# Altium PCB esp32_PCB1.PcbDoc (part 3 of 3)
Units mil, origin at the board's own origin, x right, y up, seen from the top; angles counter-clockwise.
Board outline 2700 x 1000 mil, 4 copper layers (L1, L2, L3, L4), stack 61.583 mil thick; 64 components, 75 nets, 299 pads, 140 vias.
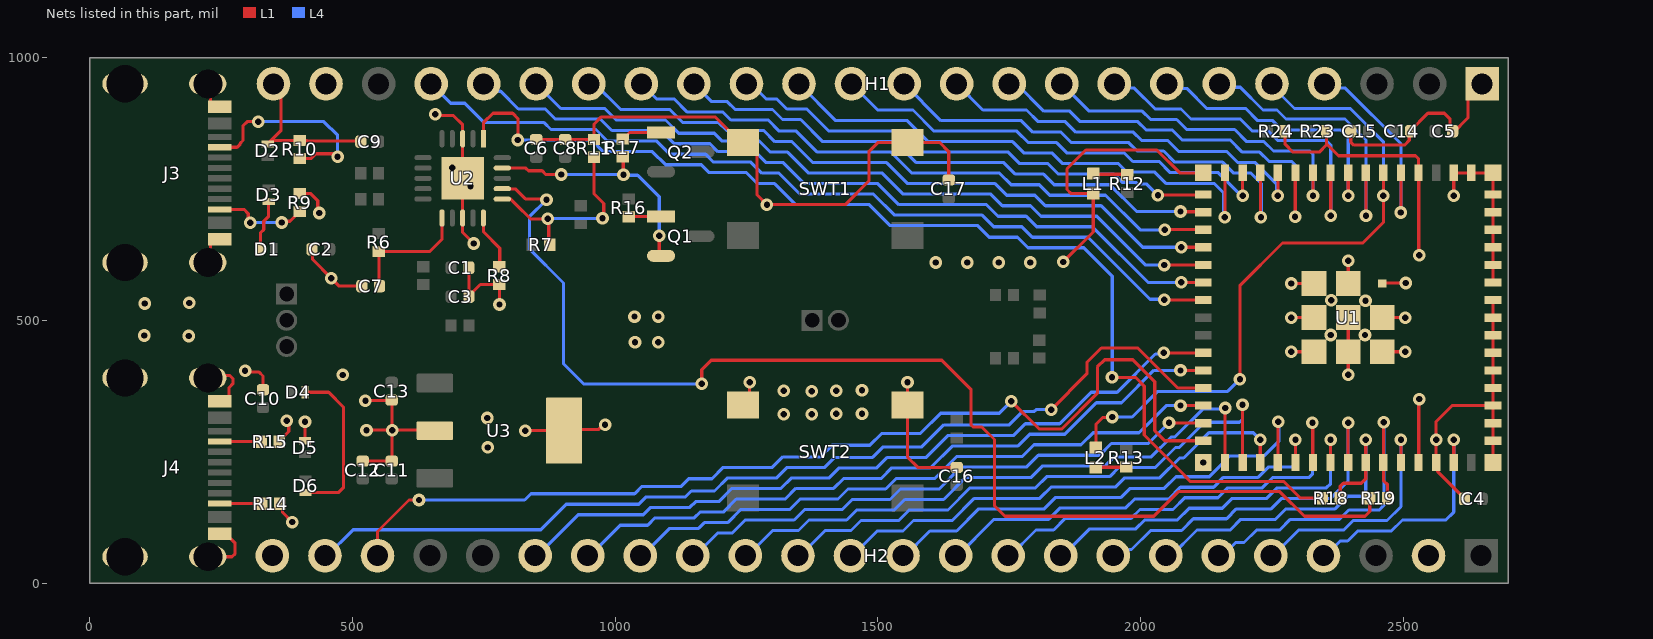
[diagram p4: the nets of this part, all layers, seen from the top]

## Via types
v1: diameter 24, hole 12, L1 to L4, tented both sides, 140 vias

## Nets (pads, with @x,y where several pads share a name; then routed paths per layer and width w, separated by ;. In a path a pad name is that pad's centre, name@x,y a point inside that pad or via, vN(x,y) a via of type N, cw(c..) or ccw(c..) an arc to the next point about the centre after c; other vN are vias at no path point) (continued)
GND: C1.2 C2.1 C3.2 C4.2 C5.2 C6.2 C7.2 C8.2 C9.2 C10.1 C11.1 C12.1 C13.2 C14.1 C15.1 C16.2 C17.1 D2.2 D5.2 H1.1 H1.23 H1.24 H2.2 H2.24 J3.A1B12 J3.B1A12 J3.S1 J3.S2 J3.S3 J3.S4 J4.A1B12 J4.B1A12 J4.S1 J4.S2 J4.S3 J4.S4 L1.1 R8.2 R9.2 R10.1 R11.1 R14.2 R15.1 SWT1.3 SWT1.4 SWT2.3 SWT2.4 U1.1 U1.2 U1.42 U1.43 U1.46 U1.47 U1.48 U1.49 U1.50 U1.51 U1.52 U1.53 U1.54 U1.55 U1.56 U1.57 U1.58 U1.59 U1.60 U1.61 U1.62 U1.63 U1.64 U1.65 U1.66 U1.67 U1.68 U1.69 U1.70 U1.71 U1.72 U1.73 U2.3 U2.13 U2.21 U3.2 U3.4 | length 5825.5
  L1 w6: J4.S2@225,50 271.14,50 277,55.86 277,75.56 258.46,94.09 J4.B1A12@247.64,94.09 ; J4.S1@225,390.16 229.84,395 267,395 272.86,389.14 272.86,379.14 265.28,371.56 265.28,352.87 258.46,346.06 J4.A1B12@247.64,346.06 ; J3.S2@225,609.84 230,614.84 230,647.13 236.81,653.94 J3.B1A12@247.64,653.94 ; J3.S1@225,950 230,945 230,912.72 236.81,905.91 J3.A1B12@247.64,905.91 ; v1(296,404) 298.68,401.32 322.68,401.32 330,394 C10.1@330,367.86 ; H2.24@350,50 H2.24@353.46,53.46 ; R15.1@360.86,269 360.86,270.18 379.07,288.39 379.07,301.14 375,305.21 v1(375,309) ; R14.2@361.86,151 366.91,145.95 366.91,135.09 v1(386,116) ; H1.24@364,950 364,860.59 D2.2@339,835.59 343.92,835.59 350.26,841.93 R10.1@400,841.93 ; R9.2@400,741 420.95,740.99 434.32,727.62 434.32,706.75 v1(437,704.07) ; D5.2@410,270.59 v1(410,307) ; 414,841.93 R10.1@400,841.93 ; C2.1@423.07,635 424.21,633.86 424.21,615.79 v1(460,580) 475,565 C7.2@518.07,565 ; C9.2@516.14,840 515.18,840.96 400.96,840.96 R10.1@400,841.93 ; C12.1@520,231.93 C11.1@575,231.93 575.5,232.43 575.5,290.5 v1(576,291) ; v1(525,347) 525.54,347.54 574.46,347.54 C13.2@575,348.07 575.5,347.57 575.5,291.5 v1(576,291) ; v1(527,291) v1(576,291) ; U3.2@656.97,290 655.97,291 v1(576,291) ; v1(658,892) 660.68,889.32 692.68,889.32 710,872 U2.3@710,845.41 U2.21@710,770 ; C3.2@721.93,545 C3.2@721.93,546.18 ; C1.2@721.93,600 C3.2@721.93,546.18 ; v1(725,755) U2.21@710,770 ; v1(731,646) 710,667 U2.13@710,694.59 U2.21@710,770 ; v1(780,530) R8.2@780,568.07 743.82,568.07 C3.2@721.93,546.18 ; v1(829,290) U3.4@903.03,290 905.03,292 968.21,292 977.21,301 v1(981,301) ; C6.2@847.88,845.94 C6.2@848.82,845 ; C6.2@850,843.93 C8.2@905,843.93 R11.1@960,843.93 960,873 974,887 1190.17,887 1238.58,838.58 SWT1.4@1243.5,838.58 1248.43,838.58 1270.02,816.99 1270.02,738.98 v1(1289,720) 1438,720 1483,765 1483,821 1500.58,838.58 SWT1.3@1556.5,838.58 1617.42,838.58 1635,821 C17.1@1635,766.93 ; SWT2.4@1243.5,338.58 1256.06,351.14 v1(1256.06,382.03) ; v1(1556.5,382.03) SWT2.3@1556.5,338.58 1556.5,239.5 1576,220 C16.2@1650,220 ; v1(1853,611) 1910,668 L1.1@1910,741 1867.86,741 1860,748.86 1860,788 1896,824 2031,824 2074.45,780.55 U1.63@2119.45,780.55 ; v1(2286.63,440) U1.73@2330.08,440 ; v1(2286.63,504.96) U1.72@2330.08,504.96 ; v1(2286.63,569.92) U1.71@2330.08,569.92 ; v1(2395.04,396.55) U1.70@2395.04,440 U1.61@2395.04,504.96 ; U1.69@2395.04,569.92 v1(2395.04,613.37) ; C15.1@2400,860 2400,839.05 2405.86,833.19 2502.19,833.19 2511.25,842.25 2511.25,857.39 C14.1@2513.86,860 2513.86,861.18 2546.68,894 2578,894 2588.62,883.38 2588.62,860.24 2593.86,855 2593.86,856.18 2623,885.32 2623,923 H1.1@2650,950 ; U1.67@2460,504.96 v1(2503.45,504.96) ; U1.66@2460,569.92 2460.98,570.91 v1(2504.43,570.91) ; U1.68@2461.97,438.03 U1.68@2460,440 v1(2503.45,440) ; U1.42@2528.9,229.37 2529.45,229.92 2529.45,349.45 v1(2530,350) ; v1(2595.83,737.1) U1.2@2595.83,780.55 U1.1@2629.29,780.55 U1.62@2670.63,780.55 U1.60@2670.63,739.21 U1.59@2670.63,705.75 U1.58@2670.63,672.28 U1.57@2670.63,638.82 U1.56@2670.63,605.35 U1.55@2670.63,571.89 U1.55@2669.65,570.91 ; C4.2@2616.14,158.82 C4.2@2616.14,160 2616.14,161.18 2565.24,212.09 2565.24,226.5 U1.43@2562.36,229.37 v1(2562.36,272.82) 2562.36,307.36 2592.64,337.64 U1.48@2670.63,337.64 ; U1.49@2669.73,372 U1.49@2670.63,371.1 ; U1.65@2670.63,229.37 U1.46@2670.63,270.71 U1.47@2670.63,304.17 U1.48@2670.63,337.64 ; U1.54@2670.63,538.43 U1.53@2670.63,504.96 U1.52@2670.63,471.5 U1.51@2670.63,438.03 U1.50@2670.63,404.57 U1.49@2670.63,371.1 ; U1.48@2670.63,337.64 U1.49@2670.63,371.1
  other v1: 2119.45,229.37 758,258 757,314 1321,321 1374,321 1421,322 1470,322 1374,365 1321,366 1421,366 1470,367 482,396 1038,458 1082,458 189,470 104,471 2362,472 2427,472 1037,507 1082,507 105,532 190,533 2428,537 2363,538 1610,610 1670,610 1730,610 1790,610 690,790
GPIO0: R23.2 R24.2 U1.4 | length 505.5
  L1 w6: R24.2@2275,860 2275,835 2290,820 2340,820 2353.86,833.86 ; R23.2@2353.86,855 2353.86,836 2376.67,813.19 2501.83,813.19 2523.04,813.19 2528.9,807.33 U1.4@2528.9,780.55 2529.45,780 2529.45,624.55 v1(2530,624)
GPIO1: H1.4 U1.5 | length 398.9
  L1 w6: v1(2495,705) 2495.22,705.22 2495.22,780.33 U1.5@2495.43,780.55
  L4 w6: H1.4@2350.38,950 2358.11,942.27 2388.73,942.27 2495.43,835.57 2495.43,705.43 v1(2495,705)
GPIO2: H1.5 L2.1 U1.6 | length 1311.8
  L1 w6: L2.1@1915,257.66 1915,301.75 1928.54,315.28 1945.28,315.28 v1(1946,316) ; v1(2189,388) 2189,566 2270,647 2423,647 2461.97,685.97 v1(2461.97,737.1) U1.6@2461.97,780.55
  L4 w6: v1(1946,316) 1984,316 2032.64,364.64 2165.64,364.64 v1(2189,388) ; H1.5@2250,950 2250,946 2293,903 2399,903 2461.97,840.03 v1(2461.97,737.1)
GPIO3: H1.6 U1.7 | length 549.1
  L1 w6: U1.7@2428.5,780.55 2428.75,780.3 2428.75,699.25 v1(2429,699)
  L4 w6: H1.6@2150,950 2156.73,943.27 2189.73,943.27 2233,900 2259.71,900 2276.71,883 2389,883 2429,843 v1(2429,699)
GPIO4: H1.7 U1.8 | length 541.6
  L1 w6: v1(2395.04,737.1) U1.8@2395.04,780.55
  L4 w6: H1.7@2050,950 2058.73,941.27 2087.73,941.27 2126,903 2200,903 2223,880 2251.42,880 2269.42,862 2381,862 2395.04,847.96 v1(2395.04,737.1)
GPIO5: H1.8 U1.9 | length 676.2
  L1 w6: U1.9@2361.57,780.55 2361.79,780.34 2361.79,699.21 v1(2362,699)
  L4 w6: H1.8@1950,950 1958.23,941.77 1988.23,941.77 2028,902 2076.89,902 2095.89,883 2190,883 2213,860 2243.14,860 2261.14,842 2353,842 2362,833 v1(2362,699)
GPIO6: H1.9 U1.10 | length 656
  L1 w6: v1(2328.11,737.1) U1.10@2328.11,780.55
  L4 w6: H1.9@1850,950 1902,898 2003,898 2019,882 2068.6,882 2087.6,863 2179,863 2202,840 2234.85,840 2252.85,822 2322.25,822 2328.11,816.14 v1(2328.11,737.1)
GPIO7: H1.10 U1.11 | length 791
  L1 w6: v1(2294,697) 2294.32,697.32 2294.32,780.23 U1.11@2294.65,780.55
  L4 w6: H1.10@1750,950 1764,950 1816,898 1865.14,898 1885.14,878 1994.72,878 2010.72,862 2060.32,862 2079.32,843 2170.72,843 2193.72,820 2226.57,820 2244.57,802 2287.79,802 2294.65,795.14 2294.65,697.65 v1(2294,697)
GPIO8: H1.11 U1.12 | length 754.5
  L1 w6: v1(2261.18,737.1) U1.12@2261.18,780.55
  L4 w6: H1.11@1650,950 1700,900 1783,900 1805,878 1856.85,878 1876.85,858 1986,858 2002,842 2052.04,842 2073.04,821 2164.43,821 2185.43,800 2218.28,800 2258.5,759.78 2258.5,739.78 v1(2261.18,737.1)
GPIO9: H1.12 U1.13 | length 908.2
  L1 w6: U1.13@2227.72,780.55 2228.36,779.91 2228.36,696.64 v1(2229,696)
  L4 w6: H1.12@1550,950 1620,880 1773,880 1795,858 1848.57,858 1868.57,838 1977.72,838 1993.72,822 2043.75,822 2064.75,801 2156.15,801 2177.15,780 2210,780 2230,760 2230,697 v1(2229,696)
GPIO10: H1.13 U1.14 | length 875.9
  L1 w6: v1(2194.25,737.1) U1.14@2194.25,780.55
  L4 w6: H1.13@1450,950 1500,900 1567,900 1607,860 1764.72,860 1786.72,838 1840.28,838 1860.28,818 1969.43,818 1985.43,802 2035.47,802 2056.47,781 2147.86,781 2191.76,737.1 v1(2194.25,737.1)
GPIO11: H1.14 U1.15 | length 1026.2
  L1 w6: v1(2160,696) 2160.39,696.39 2160.39,780.16 U1.15@2160.79,780.55
  L4 w6: H1.14@1350,950 1420,880 1556,880 1596,840 1756.43,840 1778.43,818 1832,818 1852,798 1958,798 1974,782 2027.18,782 2049.18,760 2140.58,760 2158.32,742.26 2158.32,697.68 v1(2160,696)
GPIO12: H1.15 U1.16 | length 957.8
  L1 w6: v1(2033,738) 2033.61,738.61 2118.84,738.61 U1.16@2119.45,739.21
  L4 w6: H1.15@1250,950 1258.47,950 1287.47,921 1307.99,921 1326.99,902 1365,902 1407,860 1542,860 1582,820 1748.15,820 1770.15,798 1823.72,798 1843.72,778 1949.72,778 1965.72,762 1992,762 1995,759 2012,759 v1(2033,738)
GPIO13: H1.16 U1.17 | length 1070
  L1 w6: v1(2076,707) 2076.63,706.37 2118.37,706.37 U1.17@2118.87,705.87
  L4 w6: H1.16@1150,950 1184,916 1213.71,916 1228.71,901 1299.71,901 1318.71,882 1353,882 1395,840 1533.28,840 1573.28,800 1739.86,800 1761.86,778 1815.43,778 1835.43,758 1941.43,758 1992.43,707 v1(2076,707)
GPIO14: H1.17 U1.18 | length 1184.4
  L1 w6: v1@2046,672.53 U1.18@2119.2,672.53
  L4 w6: H1.17@1050,950 1079,921 1112.53,921 1137.53,896 1205.42,896 1220.42,881 1291.42,881 1312.42,860 1345,860 1385,820 1525,820 1565,780 1731.58,780 1753.58,758 1807.15,758 1827.15,738 1933.15,738 1999.15,672 v1(2046,672)
GPIO15: H1.18 U1.19 | length 1298
  L1 w6: v1(2077.45,639.07) U1.19@2119.2,639.07
  L4 w6: H1.18@950,950 961.57,950 1010.57,901 1067,901 1104.25,901 1129.25,876 1197.14,876 1212.14,861 1283.14,861 1304.14,840 1336.72,840 1376.72,800 1516.72,800 1556.72,760 1723.29,760 1745.29,738 1798.86,738 1818.86,718 1924.86,718 2003.79,639.07 v1(2077.45,639.07)
GPIO16: H1.19 U1.20 | length 1412.4
  L1 w6: v1(2045,605) 2045.18,605.18 2118.77,605.18 U1.20@2119.2,605.6
  L4 w6: H1.19@850,950 897,903 980.28,903 1002.28,881 1058.72,881 1095.96,881 1120.96,856 1188.85,856 1203.85,841 1274.85,841 1295.85,820 1328.43,820 1368.43,780 1508.43,780 1548.43,740 1715.01,740 1737.01,718 1790.58,718 1810.58,698 1916.58,698 2009.58,605 v1(2045,605)
GPIO17: H1.20 U1.21 | length 1525.7
  L1 w6: v1(2077.45,572.14) U1.21@2119.2,572.14
  L4 w6: H1.20@750,950 764.61,950 778.85,935.77 782.23,935.77 816,902 867.28,902 886.28,883 972,883 994,861 1050.43,861 1087.68,861 1112.68,836 1180.57,836 1195.57,821 1266.57,821 1287.57,800 1320.15,800 1360.15,760 1500.15,760 1540.15,720 1706.73,720 1728.73,698 1782.29,698 1802.29,678 1908.29,678 2014.16,572.14 v1(2077.45,572.14)
GPIO18: H1.21 U1.22 | length 1639.4
  L1 w6: v1@2045,538.68 U1.22@2119.2,538.68
  L4 w6: H1.21@650,950 687.05,912.95 714.05,912.95 751,876 865,876 878,863 963.72,863 985.72,841 1079.4,841 1104.4,816 1172.28,816 1187.28,801 1258.28,801 1279.28,780 1311.86,780 1351.86,740 1491.86,740 1531.86,700 1698.44,700 1720.44,678 1774.01,678 1794.01,658 1900.01,658 2018,540.01 2043.99,540.01 v1(2045,539)
GPIO21: H2.19 U1.25 | length 1430.2
  L1 w6: v1(2044,438) U1.25@2119.45,438.03
  L4 w6: H2.19@850,50 930,130 1053.72,130 1067.72,144 1142.43,144 1153.43,155 1197.57,155 1222.57,180 1315.86,180 1335.86,200 1407.58,200 1426.58,219 1498.29,219 1518.29,239 1592.01,239 1634.01,281 1758.73,281 1780.73,303 1846,303 1906,363 1955.43,363 2028.12,435.69 2041.69,435.69 v1(2044,438)
GPIO26: H2.18 U1.26 | length 1316.3
  L1 w6: v1(2076,404.57) U1.26@2119.45,404.57
  L4 w6: H2.18@950,50 1010,110 1062,110 1076,124 1150.72,124 1161.72,135 1205.85,135 1230.85,160 1324.15,160 1344.15,180 1415.86,180 1434.86,199 1506.58,199 1526.58,219 1600.29,219 1642.29,261 1767.01,261 1789.01,283 1856,283 1916,343 1963.72,343 2025.28,404.57 v1(2076,404.57)
GPIO33: H2.17 U1.28 | length 1188.6
  L1 w6: v1(2076,337.64) U1.28@2119.45,337.64
  L4 w6: H2.17@1050,50 1104,104 1159,104 1170,115 1214.14,115 1239.14,140 1332.43,140 1352.43,160 1424.15,160 1443.15,179 1514.86,179 1534.86,199 1608.58,199 1650.58,241 1775.29,241 1797.29,263 1886.72,263 1909.72,286 1997.06,286 2021.12,310.06 2048.7,337.64 v1(2076,337.64)
GPIO34: H2.16 U1.29 | length 1075.3
  L1 w6: v1(2054.12,304.88) 2054.48,304.52 2119.1,304.52 U1.29@2119.45,304.17
  L4 w6: H2.16@1150,50 1195,95 1222.42,95 1247.42,120 1340.72,120 1360.72,140 1432.43,140 1451.43,159 1523.15,159 1543.15,179 1616.86,179 1658.86,221 1783.58,221 1805.58,243 1922,243 1944.42,265.42 2014.67,265.42 v1(2054.12,304.88)
GPIO35: H2.15 U1.31 | length 1131.9
  L1 w6: U1.31@2160.79,229.37 2160.89,229.48 2160.89,332.89 v1(2161,333)
  L4 w6: H2.15@1250,50 1300,100 1349,100 1369,120 1440.72,120 1459.72,139 1531.43,139 1551.43,159 1625.15,159 1667.15,201 1791.86,201 1813.86,223 1933,223 1950,240 2020.19,240 2058.07,277.88 2065.31,277.88 2118.43,331 2159,331 v1(2161,333)
GPIO36: H2.14 U1.32 | length 1089.3
  L1 w6: v1(2194,339) 2194.13,338.87 2194.13,229.5 U1.32@2194.25,229.37
  L4 w6: H2.14@1350,50 1400,100 1449,100 1468,119 1539.72,119 1559.72,139 1633.43,139 1675.43,181 1800.15,181 1822.15,203 1942,203 1959,220 2028.48,220 2066.35,257.88 2073.59,257.88 2121.72,306 2188.14,306 2194,311.86 v1(2194,339)
GPIO37: H2.13 U1.33 | length 924.4
  L1 w6: U1.33@2227.72,229.37 v1(2227.72,272.82)
  L4 w6: H2.13@1450,50 1499,99 1548,99 1568,119 1641.72,119 1683.72,161 1808.43,161 1830.43,183 1953,183 1970,200 2036.76,200 2074.64,237.88 2081.88,237.88 2130,286 2214.54,286 v1(2227.72,272.82)
GPIO38: H2.12 U1.34 | length 919.6
  L1 w6: U1.34@2261.18,229.37 2261.59,229.78 2261.59,306.59 v1(2262,307)
  L4 w6: H2.12@1550,50 1599,99 1650,99 1692,141 1816.72,141 1838.72,163 1963,163 1980,180 2045.05,180 2067.42,202.37 2130.63,202.37 2170.26,242 2235.08,242 2263,269.92 2263,306 v1(2262,307)
GPIO39: H2.11 U1.35 | length 807.3
  L1 w6: U1.35@2294.65,229.37 v1(2294.65,272.82)
  L4 w6: H2.11@1650,50 1721,121 1825,121 1847,143 1972,143 1989,160 2053.33,160 2075.7,182.37 2138.92,182.37 2157.55,201 2223.58,201 2243.58,221 2288.79,221 2294.65,226.86 v1(2294.65,272.82)
GPIO40: H2.10 U1.36 | length 816.1
  L1 w6: v1(2327,305) 2327.56,304.44 2327.56,229.93 U1.36@2328.11,229.37
  L4 w6: H2.10@1750,50 1801,101 1834.53,101 1856.53,123 1982,123 1999,140 2061.62,140 2083.99,162.37 2147.2,162.37 2165.83,181 2231.86,181 2251.86,201 2321,201 2327,207 v1(2327,305)
GPIO41: H2.9 U1.37 | length 696.4
  L1 w6: U1.37@2361.57,229.37 v1(2361.57,272.82)
  L4 w6: H2.9@1850,50 1903,103 1991,103 2008,120 2069.9,120 2092.27,142.37 2155.49,142.37 2174.12,161 2240.15,161 2260.15,181 2353.58,181 2361.57,189 v1(2361.57,272.82)
GPIO42: H2.8 U1.38 | length 691.2
  L1 w6: U1.38@2395.04,229.37 v1(2395,305)
  L4 w6: H2.8@1950,50 1964.61,50 1978.35,63.73 1982.73,63.73 2019,100 2078.18,100 2100.55,122.37 2163.77,122.37 2182.4,141 2248.43,141 2268.43,161 2361.86,161 2395,194.14 v1(2395,305)
GPIO45: H2.5 U1.41 | length 455.8
  L1 w6: U1.41@2495.43,229.37 v1(2495.43,272.82)
  L4 w6: H2.5@2250,50 2301,101 2386.72,101 2404.72,119 2469,119 2495.43,145.43 v1(2495.43,272.82)
GPIO46: H2.4 U1.44 | length 462.4
  L1 w6: U1.44@2595.83,229.37 v1(2595.83,272.82)
  L4 w6: H2.4@2350,50 2380,80 2394,80 2413,99 2477.28,99 2498.28,120 2581,120 2595.83,134.83 v1(2595.83,272.82)
GPIO47: H2.23 U1.27 | length 1878.2
  L1 w6: v1(1829.91,330) 1897.85,397.92 1897.85,419.65 1925.38,447.18 1994.82,447.18 2070.9,371.1 U1.27@2119.45,371.1
  L4 w6: H2.23@450,50 501.5,101.5 858.5,101.5 907,150 1045.43,150 1059.43,164 1134.15,164 1145.15,175 1189.28,175 1214.28,200 1307.58,200 1327.58,220 1399.29,220 1418.29,239 1490.01,239 1510.01,259 1583.73,259 1625.73,301 1750.44,301 1776.12,326.68 1797.91,326.68 1801.23,330 v1(1829.91,330)
GPIO48: H2.22 U1.30 | length 1944.8
  L1 w6: H2.22@548,52 548,98 608,158 v1(627,158) ; v1(1754,346) 1807,293 1850,293 1917.85,360.85 1917.85,411.37 1931.48,425 1957,425 1957.18,424.82 1985.18,424.82 2027,383 2027,290 2046.29,270.71 U1.30@2119.45,270.71
  L4 w6: v1(627,158) 827.97,158 839.97,170 1037.15,170 1051.15,184 1125.86,184 1140.36,198.5 1184.5,198.5 1206,220 1299.29,220 1319.29,240 1391.01,240 1413.26,262.25 1484.98,262.25 1507.23,284.5 1580.94,284.5 1619.44,323 1731,323 v1(1754,346)
NetC7_1: C7.1 R6.2 U2.11 | length 237.6
  L1 w6: C7.1@551.93,565 550.96,565.96 550.96,630.18 R6.2@550,631.14 647.77,631.14 670.63,654 U2.11@670.63,694.59
NetD1_2: D1.2 D3.2 | length 97.8
  L1 w6: D1.2@325,635 325,666 331.57,672.57 331.57,688.34 340.82,697.59 D3.2@340.82,726.23
NetD4_2: D4.2 D6.2 | length 314.2
  L1 w6: D4.2@410,363 455,363 483,335 483,181 474.41,172.41 D6.2@411,172.41
NetJ3_A5: J3.A5 R10.2 | length 392
  L1 w6: J3.A5@247.64,829.13 280.86,829.13 286.43,834.7 286.43,836.48 287,837.05 292,842.05 292,870 300,878 v1(321,878) ; R10.2@400,808.07 422.07,808.07 431,817 466,817 v1(472,811)
  L4 w6: v1(321,878) 446,878 472,852 v1(472,811)
NetJ3_B5: J3.B5 R9.1 | length 180.6
  L1 w6: J3.B5@247.64,711.02 293.98,711.02 302.12,702.88 302.12,689.04 v1(305.57,685.6) ; v1(366,686) 368.54,688.54 381.4,688.54 392.19,699.33 392.19,700.51 398.82,707.14 R9.1@400,707.14
  L4 w6: v1(305.57,685.6) 305.77,685.8 365.8,685.8 v1(366,686)
NetJ4_A5: J4.A5 R15.2 | length 79.5
  L1 w6: J4.A5@247.64,269.29 247.78,269.15 326.85,269.15 R15.2@327,269
NetJ4_B5: J4.B5 R14.1 | length 80.4
  L1 w6: J4.B5@247.64,151.18 247.73,151.09 327.91,151.09 R14.1@328,151
NetL1_2: L1.2 R12.1 | length 65.9
  L1 w6: L1.2@1910,779 1911.04,777.96 1973.96,777.96 R12.1@1975,776.93
NetL2_2: L2.2 R13.1 | length 58.6
  L1 w6: L2.2@1915,219.66 1915.7,220.37 1972.3,220.37 R13.1@1973,221.07
NetQ1_1: Q1.1 R16.1 | length 68.2
  L1 w6: R16.1@1024.82,697.07 R16.1@1026,697.07 1026.17,697.24 1087.41,697.24 Q1.1@1087.58,697.4 Q1.1@1085.71,699.27 ; R16.1@1025,701.14 R16.1@1026.87,699.27
NetQ2_1: Q2.1 R17.1 | length 78.2
  L1 w6: R17.1@1015,845 1016.18,845 1021.81,850.63 1021.81,851.54 1027.67,857.4 Q2.1@1087.58,857.4
NetR8_1: R8.1 U2.15 | length 106.7
  L1 w6: 749.37,668.63 U2.15@749.37,694.59 ; 750,668 780.65,637.35 780.65,603.76 778.82,601.93 R8.1@780,601.93
RTS_FTDI: Q1.2 R17.2 U2.19 | length 469.7
  L1 w6: U2.19@785.41,789.68 785.5,789.6 825.95,789.6 830.12,789.6 835.28,784.44 861.18,784.44 868.16,777.47 v1(897.63,777.47) ; R17.2@1015,811.14 1015.5,810.64 1015.5,777.5 v1(1016,777) ; v1(1084,661) 1084,626.18 Q1.2@1087.58,622.6
  L4 w6: v1(897.63,777.47) 1015.53,777.47 1017,776 1043,776 1084,735 v1(1084,661)
RXD_FTDI: R18.2 U2.1 | length 2129.9
  L1 w6: U2.1@749.37,845.41 749.37,875.55 767.82,894 805,894 815,884 v1(815,843) ; v1(1945.62,391.38) 1990.34,391.38 2007,374.72 2007,281.72 2085,203.72 2085,203 2095,193 2272.87,193 2304.23,161.64 R18.2@2346.01,161.64
  L4 w6: v1(815,843) 955.43,843 977.43,821 1071.11,821 1096.11,796 1164,796 1179,781 1250,781 1271,760 1303.58,760 1343.58,720 1483.58,720 1523.58,680 1690.16,680 1712.16,658 1765.73,658 1785.73,638 1891.73,638 1946,583.73 1946,391.75 v1(1945.62,391.38)
TXD_FTDI: R19.2 U2.17 | length 2334.1
  L1 w6: U2.17@785.41,750.32 785.71,750.02 810.37,750.02 811,749.39 829.39,731 867.94,731 v1(869.47,729.47) ; v1(1165,379) 1165,406 1182.89,423.89 1621.88,423.89 1659.77,386 1677,368.77 1677,301.69 1681.69,297 1698,297 1722,273 1722,147 1742,127 2025,127 2072,174 2265,174 2312,127 2427,127 2436.01,136.01 R19.2@2436.01,161.64
  L4 w6: v1(869.47,729.47) 837,697 837,636 902,571 902,417 940,379 v1(1165,379)
U0RXD: H2.6 R19.1 U1.40 | length 659.8
  L1 w6: v1(2463,306) 2462.48,305.48 2462.48,229.89 U1.40@2461.97,229.37 2461.97,195.03 2470,187 2470,161.77 R19.1@2469.87,161.64
  L4 w6: H2.6@2150,50 2153.86,50 2180.86,77 2196.71,77 2220.71,101 2265,101 2285,121 2378.43,121 2396.43,139 2454.15,139 2463,147.85 v1(2463,306)
U0TXD: H2.7 R18.1 U1.39 | length 681.8
  L1 w6: R18.1@2379.87,161.64 2380,161.77 2380,184.14 2385.86,190 2420,190 2428.5,198.5 U1.39@2428.5,229.37 v1(2428.5,272.82)
  L4 w6: H2.7@2050,50 2056.47,50 2107.47,101 2170.68,101 2190.68,121 2256.72,121 2276.72,141 2370.15,141 2394.29,165.14 2422.65,165.14 2428.5,171 v1(2428.5,272.82)
VBUS_SENSE: R7.1 R11.2 U2.16 | length 381.9
  L1 w6: U2.16@785.41,730.63 785.64,730.4 801.58,730.4 811,720.98 838.98,693 v1(872,693) 873.93,691.07 873.93,645.93 R7.1@875.86,644 ; R11.2@960,810.07 960,740.6 978.4,722.2 978.4,696.4 v1(976,694)
  L4 w6: v1(872,693) 872.5,693.5 975.5,693.5 v1(976,694)
pads on no net: J3.A8 J3.B8 J4.A8 J4.B8 U2.2 U2.4 U2.5 U2.6 U2.7 U2.14

## Polygon pours and split planes (outlines as drawn)
GND on L1 "GND_L01_P011" (solid, pour order 11): 411,646 411,595 447,559 447,396 448,396 503,341 503,221 589,221 602,234 602,248 716,248 732,232 789,232 815,206 963,206 1012,255 1012,343 1021,343 1118,440 1118,551 1109,560 1024,560 996,532 996,443 928,375 822,375 822,373 786,337 679,337 677,335 599,335 590,344 590,355 585,360 535,360 516,379 516,513 531,528 531,576 529,578 504,578 501,575 479,575 476,578 476,583 465,594 461,594 437,618 434,618 434,625 435,626 435,646 433,648 413,648
GND on L1 "GND_L01_P017" (solid, pour order 17): 2290,608 2309,627 2485,627 2520,592 2578,592 2614,628 2614,805 2690,805 2690,207 2654,207 2651,210 2651,325 2594,325 2567,298 2516,298 2516,321 2472,365 2280,365 2240,405 2240,576 2272,608
GND on L1 "GND_L01_P014" (solid, pour order 14): 1583,584 1592,575 1838,575 1940,677 1940,751 1936,755 1886,755 1881,760 1881,792 1894,805 2000,805 2045,760 2133,760 2138,765 2138,801 2095,844 1846,844 1669,667 1630,628 1593,628 1583,618
GND on L1 "GND_L01_P013" (solid, pour order 13): 1204,396 1202,394 1202,300 1219,283 1278,283 1353,208 1662,208 1667,213 1667,234 1659,242 1609,242 1601,250 1605,254 1605,330 1610,335 1610,385 1595,400 1569,400
GND on L1 "GND_L01_P012" (solid, pour order 12): 711,613 711,530 716,525 750,525 750,524 764,510 797,510 806,519 805,520 805,576 803,578 752,578 752,580 740,592 740,611 734,617 714,617 710,613
GND on L1 "GND_L01_P010" (solid, pour order 10): 350,252 352,250 371,250 379,258 379,260 382,263 426,263 430,267 430,320 422,328 377,328 370,321 364,321 359,316 359,304 350,295 350,281
+3V3_REG on L1 "+3V3_REG_L01_P005" (solid, pour order 5): 506,211 506,183 510,179 707,179 724,162 750,162 769,181 769,199 751,217 711,217 703,225 621,225 606,210
+5V on L1 "+5V_L01_P004" (solid, pour order 4): 620,550 612,542 586,542 580,536 580,514 585,509 585,411 573,399 564,399 564,398 558,392 558,372 560,370 615,370 618,367 618,358 623,353 694,353 700,359 700,402 692,410 625,410 620,415 620,510 626,516 634,516 649,531 649,581 620,581
+3V3 on L1 "+3V3_L01_P003" (solid, remove dead copper, pour order 3): 1959,755 1959,673 1880,594 1880,563 1885,558 1913,558 1998,643 1998,671 1990,679 1990,755
+3V3 on L1 "+3V3_L01_P002" (solid, remove dead copper, pour order 2): 710,505 710,454 726,438 799,438 950,589 950,695 949,696 922,696 922,581 817,476 759,476 758,475 740,493 740,504 739,505
+3V3 on L1 "+3V3_L01_P001" (solid, remove dead copper, pour order 1): 1405,526 1405,475 1409,471 1511,471 1516,476 1515,477 1515,516 1505,526
+3V3 on L1 "+3V3_L01_P000" (solid, pour order 0): 2437.75,878.18 2422,878.18 2422,848 2492,848 2492,872 2533,913 2573,913 2589,929 2589,978.26 2577.08,990.18 2525.08,990.18 2510.08,975.18 2510.08,947.65
GND on L4 "GND_L04_P018" (solid, pour order 18): 76,549 91,564 206,564 219,551 219,450 206,437 83,437 71,449 72,450 72,545
+3V3 on L4 "+3V3_L04_P008" (solid, pour order 8): 1625,369 1625,345 1630,340 1722,340 1731,349 1731,375 1726,380 1636,380
+3V3 on L4 "+3V3_L04_P007" (solid, pour order 7): 1410,525 1410,519 1404,513 1404,487 1416,475 1508,475 1521,488 1520,489 1520,512 1507,525
GND on L2 "GND_L02_P023" (solid, pour order 23): 2683,990 2683,18 22,18 20,20 20,990
+5V on L2 "+5V_L02_P009" (solid, pour order 9): 405,528 405,472 411,466 624.85,466 897,792.23 897,986 567,986 534,986 516,968 516,906 530,892 530,834 530,528
+3V3 on L2 "+3V3_L02_P020" (solid, pour order 20): 760,483 760,435 866,435 871,430 976,430 1010,464 1009,465 1009,551 1018,560 1048,530 1246,530 1273,557 1399,557 1403,553 1403,520 1403,437 1569,437 1569,432 1590,411 1590,18 2683,18 2683,986 1925,986 1925,780 2548,780 2548,382 2581,349 2581,180 2051.5,180 1925,306.5 1925,986 904,986 904,527 883,506 782,506 759,483
+3V3_REG on L2 "+3V3_REG_L02_P021" (solid, pour order 21): 603,275 888,275 1043,430 1089,430 1143,484 1261,484 1313,536 1395,536 1395,15 603,15
GND on L3 (split plane): 2699.95,0.05 0.05,0.05 0.05,999.95 2699.95,999.95

## Silkscreen, mask and mechanical layers (free items; w line width, h text height)
Top Overlay:
  text "|" at 1749,867.01 h40
  text "J1" at 2123.34,855.01 h40
  text "BOOT" at 1724.99,676 h40 r90
  text "USR" at 1886,660.01 h40
  text "REG" at 1265,550.67 h40
  text "3V3" at 1420,550.67 h40
  text "UART" at 51.69,530.01 h40
  text "5V" at 430,470.67 h40
  text "ESP" at 56,430.01 h40
  text "USB2" at 430,410.67 h40
  text "PWR" at 1891,300.01 h40
  text "RESET" at 1159.99,156 h40 r90
  text "|" at 749,134.99 h40 r180
  text "|" at 1749,134.99 h40 r180
  text "|" at 2249,134.99 h40 r180
  text "J2" at 2116.68,105.01 h40
Bottom Overlay:
  text "GND" at 369.99,878.32 h40 r90
  text "GND" at 469.99,878.32 h40 r90
  text "+5V" at 569.99,878.32 h40 r90
  text "IO18" at 669.99,878.32 h40 r90
  text "IO17" at 769.99,878.32 h40 r90
  text "IO16" at 869.99,878.32 h40 r90
  text "IO15" at 969.99,878.32 h40 r90
  text "IO14" at 1069.99,878.32 h40 r90
  text "IO13" at 1169.99,878.32 h40 r90
  text "IO12" at 1269.99,878.32 h40 r90
  text "IO11" at 1369.99,878.32 h40 r90
  text "IO10" at 1469.99,878.32 h40 r90
  text "IO9" at 1569.99,878.32 h40 r90
  text "IO8" at 1669.99,878.32 h40 r90
  text "IO7" at 1769.99,878.32 h40 r90
  text "IO6" at 1869.99,878.32 h40 r90
  text "IO5" at 1969.99,878.32 h40 r90
  text "IO4" at 2069.99,878.32 h40 r90
  text "IO3" at 2169.99,878.32 h40 r90
  text "IO2" at 2269.99,878.32 h40 r90
  text "IO1" at 2369.99,878.32 h40 r90
  text "IO0" at 2469.99,878.32 h40 r90
  text "3V3" at 2569.99,878.32 h40 r90
  text "GND" at 2669.99,878.32 h40 r90
  text "QuadBot (C)  / 2024" at 2337.19,829.24 h40 r90
  text "Aathil / Ahmeth" at 2538.14,829.24 h40 r90
  text "USB_N" at 666.66,308.29 h40 r90
  text "USB_P" at 766.66,308.29 h40 r90
  text "UOTXD" at 2069.99,308.29 h40 r90
  text "U0RXD" at 2169.99,308.29 h40 r90
  text "IO47" at 469.99,261.64 h40 r90
  text "IO48" at 569.99,261.64 h40 r90
  text "IO26" at 969.99,261.64 h40 r90
  text "IO33" at 1069.99,261.64 h40 r90
  text "IO34" at 1169.99,261.64 h40 r90
  text "IO35" at 1269.99,261.64 h40 r90
  text "IO36" at 1369.99,261.64 h40 r90
  text "IO37" at 1469.99,261.64 h40 r90
  text "IO38" at 1569.99,261.64 h40 r90
  text "IO39" at 1669.99,261.64 h40 r90
  text "IO40" at 1769.99,261.64 h40 r90
  text "IO42" at 1969.99,261.64 h40 r90
  text "IO45" at 2269.99,261.64 h40 r90
  text "IO46" at 2369.99,261.64 h40 r90
  text "IO21" at 869.99,248.31 h40 r90
  text "IO41" at 1869.99,248.31 h40 r90
  text "GND" at 369.99,228.32 h40 r90
  text "GND" at 2569.99,228.32 h40 r90
  text "3V3" at 2669.99,228.32 h40 r90
  text "EN" at 2469.99,188.33 h40 r90
Board Shape:
  the board outline again, w20